# EAGLE board ethernet (EAGLE 6.4)
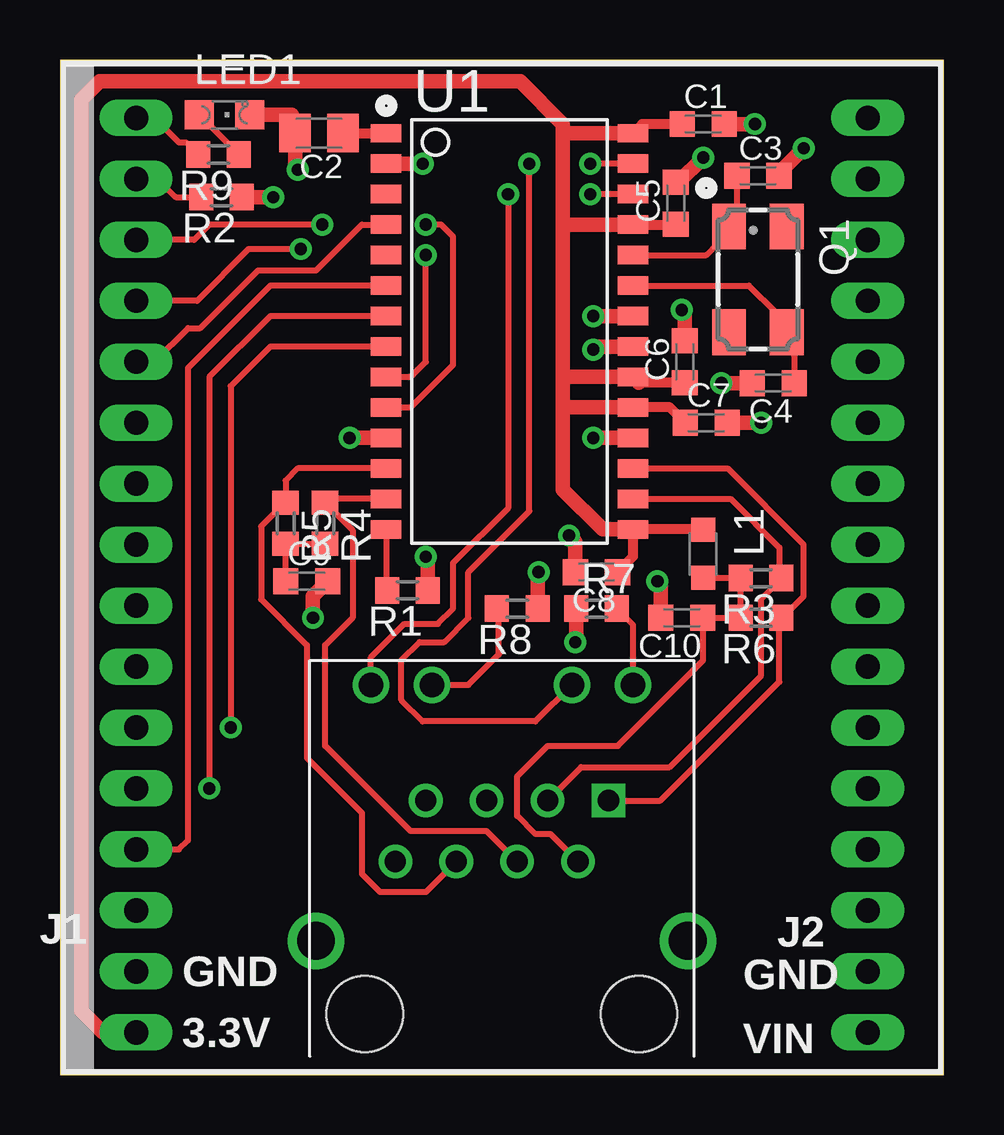
[diagram p0: board, top side]
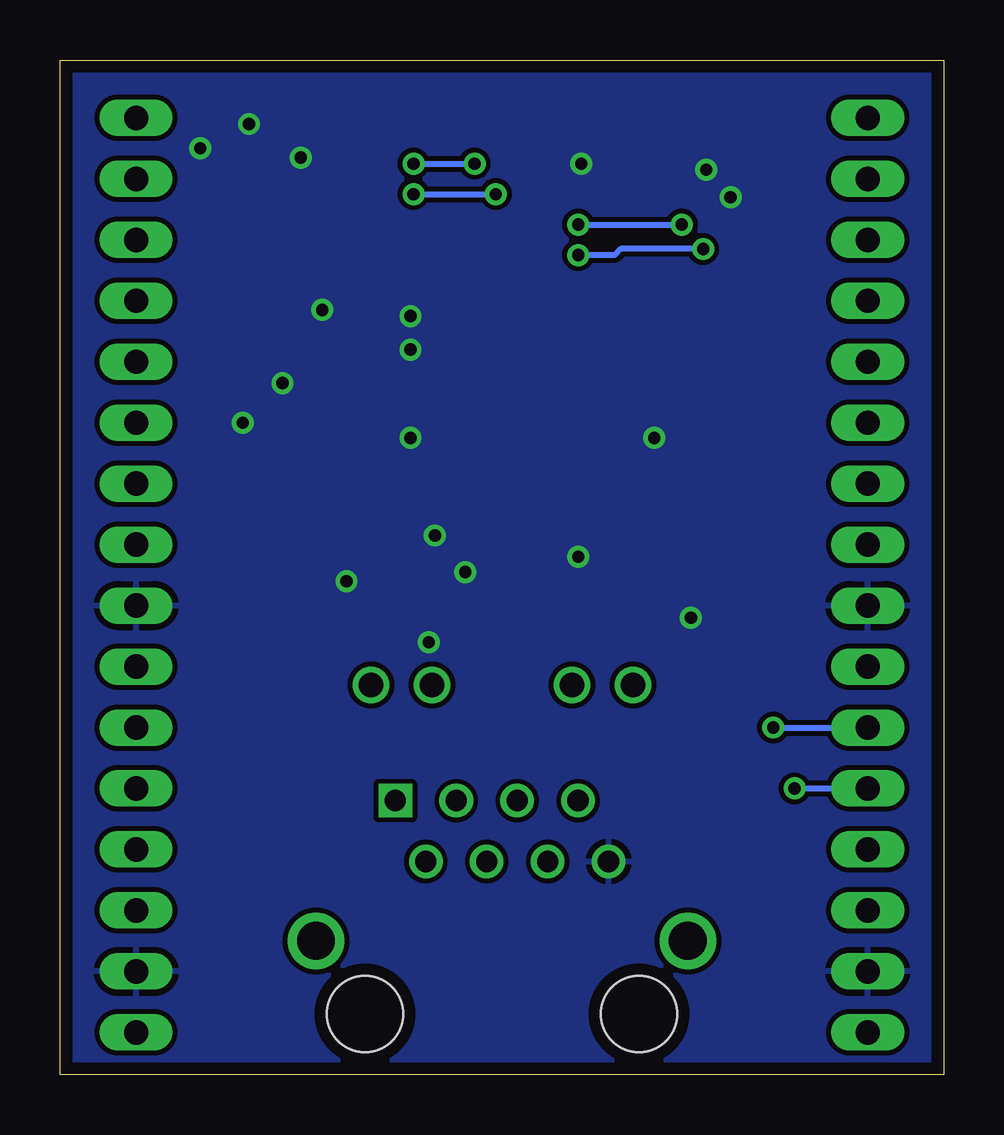
[diagram p1: board, bottom side, seen from below]

Size 36.83 x 42.29 mm. Coordinates in mm from the lower left corner, seen from the top.
Outline: 0,0 36.83,0 36.83,42.29 0,42.29 0,0
Copper layers (1*16): Top 0.035mm / dielectric 1.5mm / Bottom 0.035mm
Design rules "default *": minimum track width 10mil, minimum drill 20mil, track to track 8mil, track to pad 8mil, pad to pad 8mil, via to via 8mil, smd to smd 8mil, copper to edge 20mil, drill to drill 8mil, minimum pad ring 10mil, minimum via ring 8mil, stop-mask expansion 4mil, vias tented up to drill 0mil, thermal gap 10mil

## Footprints (pad centres in the part's own frame; a part is rotated, then mirrored left to right if it is on the bottom)
C0603K = smd 1.05 x 1.08: 1 -0.875,0; 2 0.875,0
C0805K = smd 1.3 x 1.6: 1 -1,0; 2 1,0
MA016-1 = drill 1.016 long: 1 -19.05,0; 2 -16.51,0; 3 -13.97,0; 4 -11.43,0; 5 -8.89,0; 6 -6.35,0; 7 -3.81,0; 8 -1.27,0; 9 1.27,0; 10 3.81,0; 11 6.35,0; 12 8.89,0; 13 11.43,0; 14 13.97,0; 15 16.51,0; 16 19.05,0
SI-50154 = drill 0.889 square: P$1 10.16,8.89 | drill 0.889: P$2 8.89,6.35; P$3 7.62,8.89; P$4 6.35,6.35; P$5 5.08,8.89; P$6 3.81,6.35; P$7 2.54,8.89; P$8 1.27,6.35 | drill 1.016: P$9 11.176,13.716; P$10 8.636,13.716; P$11 2.794,13.716; P$12 0.254,13.716 | drill 1.575: P$13 13.462,3.048; P$14 -2.032,3.048 | hole 3.175: 0,0; 11.43,0
L2012C = smd 1 x 1: 1 -1,0; 2 1,0
CHIPLED_0805 = smd 1.2 x 1.2: A 0,-1.05; C 0,1.05
CTS406 = smd 1.9 x 1.4: 1 -2.2,-1.2; 2 2.2,-1.2; 3 2.2,1.2; 4 -2.2,1.2
R0603 = smd 1 x 1.1: 1 -0.85,0; 2 0.85,0
SO-28W = smd 0.762 x 1.27: 1 -8.255,-5.207; 2 -6.985,-5.207; 3 -5.715,-5.207; 4 -4.445,-5.207; 5 -3.175,-5.207; 6 -1.905,-5.207; 7 -0.635,-5.207; 8 0.635,-5.207; 9 1.905,-5.207; 10 3.175,-5.207; 11 4.445,-5.207; 12 5.715,-5.207; 13 6.985,-5.207; 14 8.255,-5.207; 15 8.255,5.08; 16 6.985,5.08; 17 5.715,5.08; 18 4.445,5.08; 19 3.175,5.08; 20 1.905,5.08; 21 0.635,5.08; 22 -0.635,5.08; 23 -1.905,5.08; 24 -3.175,5.08; 25 -4.445,5.08; 26 -5.715,5.08; 27 -6.985,5.08; 28 -8.255,5.08

## Placement (x,y rotation side)
C1  0.1 uF  [C0603K]  26.8,39.62 0 top
C2  22 uF  [C0805K]  10.79,39.24 180 top
C3  18 pF  [C0603K]  29.08,37.47 0 top
C4  18 pF  [C0603K]  29.72,28.83 180 top
C5  0.1 uF  [C0603K]  25.65,36.32 90 top
C6  0.1 uF  [C0603K]  26.04,29.72 90 top
C7  0.1 uF  [C0603K]  26.92,27.18 0 top
C8  0.1 uF  [C0603K]  22.35,20.95 180 top
C9  0.1 uF  [C0603K]  10.29,20.57 0 top
C10  0.1 uF  [C0603K]  25.91,19.05 180 top
J1  MA016-1  [MA016-1]  3.17,20.83 90 top
J2  MA016-1  [MA016-1]  33.66,20.83 90 top
J3  SI-50154  [SI-50154]  12.7,2.54 0 top
L1  Ferrite 80mA  [L2012C]  26.8,21.72 270 top
LED1  Green  [CHIPLED_0805]  6.86,40.01 270 top
Q1  25 MHz  [CTS406]  29.08,33.15 270 top
R1  2.32k 1%  [R0603]  14.48,20.19 180 top
R2  150  [R0603]  6.73,36.58 180 top
R3  50  [R0603]  29.21,20.7 180 top
R4  50  [R0603]  11.05,22.99 270 top
R5  50  [R0603]  9.4,22.99 270 top
R6  50  [R0603]  29.21,19.05 180 top
R7  150  [R0603]  22.35,19.43 0 top
R8  150  [R0603]  19.05,19.43 180 top
R9  150  [R0603]  6.6,38.35 180 top
U1  ENC28J60  [SO-28W]  18.8,30.99 270 top

## Library data of the parts
C1-C10 L1 R1-R9 = rcl
J1-J3 U1 = sapphire
LED1 = led
Q1 = crystal; OC_FARNELL: unknown; OC_NEWARK: unknown

## Nets
ADC0: J2.9
ADC1: J2.10
ADC2: J2.11
ADC3: J2.12
ADC4_TCK: J2.13
ADC5_TMS: J2.14
ADC6_TDO: J2.15
ADC7_TDI: J2.16
GND: C1.2 C2.2 C3.2 C4.2 C5.2 C6.2 C7.2 C8.2 C9.2 C10.2 J1.2 J1.8 J2.2 J2.8 J3.P$8 LED1.C R1.1 R2.1 R7.1 R8.1 U1.2 U1.11 U1.18 U1.21 U1.22
GPIO0: J1.16 R9.2
GPIO1: J1.15 R2.2
GPIO2: J1.14 U1.10
GPIO3: J1.13 U1.9
GPIO4_INT0: J1.12 U1.4
GPIO5_INT1: J1.11
GPIO6_INT2: J1.10
GPIO7_INT3: J1.9
LEDA: J3.P$10 U1.27
LEDA-: J3.P$9 R7.2
LEDB: J3.P$12 U1.26
LEDB-: J3.P$11 R8.2
MISO: J1.4 U1.6
MOSI: J1.5 U1.7
N$107: LED1.A R9.1
N$124: J3.P$5
N$130: J3.P$13
N$131: J3.P$14
PWM0: J2.5
PWM1: J2.6
PWM2: J2.7
RBIAS: R1.2 U1.14
RESET: J1.3
RSVD0: J2.4
RSVD1: J2.3
SCK: J1.6 U1.8
SS: J1.7
TCT: C10.1 J3.P$2 L1.2 R3.2 R6.2
TPIN+: J3.P$4 R4.1 U1.13
TPIN-: J3.P$6 R5.1 U1.12
TPIN_CAP: C9.1 R4.2 R5.2
TPOUT+: J3.P$1 R6.1 U1.17
TPOUT-: J3.P$3 R3.1 U1.16
V_IN: J2.1
VCAP: C2.1 U1.1
VCC: C1.1 C5.1 C6.1 C7.1 C8.1 J1.1 L1.1 U1.15 U1.19 U1.20 U1.25 U1.28
XTAL3: C3.1 Q1.1 U1.24
XTAL4: C4.1 Q1.3 U1.23

## Tracks (layer width: path | path; a pad name or v marks a point on that pad's centre or on a via)
GND  (via drill 0.51)
  Top 0.61: LED1.C 9.65,40.01 9.65,39.39 C2.2 9.79,37.83 v9.91,37.72 | R2.1 v8.89,36.58 | U1.2 v15.11,37.97 | C5.2 25.77,37.2 v26.8,38.23 | C1.2 v28.96,39.62 | C3.2 29.96,37.58 v30.99,38.61 | C6.2 26.04,31.75 v25.91,31.88 | v22.23,31.62 U1.22 | U1.21 22.35,30.35 v22.23,30.23 | U1.18 v22.23,26.54 | v27.56,28.83 C4.2 | C7.2 v29.21,27.18 | C8.2 21.48,22.21 v21.21,22.48 | R8.1 19.9,20.92 v19.94,20.95 | R7.1 21.5,18.07 v21.46,18.03 | C10.2 25.03,20.43 v24.89,20.57 | R1.1 15.33,21.5 v15.24,21.59 | v10.54,19.05 10.54,19.95 C9.2 | v12.06,26.54 U1.11
  pour Bottom: -0.89,43.43 -0.89,-1.52 38.86,-1.52 38.86,43.43
GPIO0
  Top 0.254: J1.16 3.94,39.88 4.95,38.86 5.25,38.86 R9.2
GPIO1
  Top 0.254: J1.15 4.06,37.34 4.83,36.58 R2.2
GPIO2  (via drill 0.51)
  Top 0.254: U1.10 14.61,27.81 16.38,29.59 16.38,34.92 15.88,35.43 v15.24,35.43 | v10.92,35.43 6.22,35.43 5.59,34.8 J1.14
  Bottom 0.254: v15.24,35.43 v10.92,35.43
GPIO3  (via drill 0.51)
  Top 0.254: U1.9 14.61,29.08 15.24,29.72 v15.24,34.16 | J1.13 5.71,32.26 7.87,34.42 v10.03,34.42
  Bottom 0.254: v10.03,34.42 13.46,34.42 13.72,34.16 v15.24,34.16
GPIO4_INT0
  Top 0.254: J1.12 3.94,29.72 5.33,31.11 5.84,31.11 8.26,33.53 10.67,33.53 12.57,35.43 U1.4
LEDA  (via drill 0.51)
  Top 0.254: J3.P$10 19.81,14.73 15.11,14.73 14.22,15.62 14.22,17.27 14.99,18.03 16,18.03 17.02,19.05 17.02,20.95 19.56,23.5 v19.56,37.97 | U1.27 v22.1,37.97
  Bottom 0.254: v22.1,37.97 v19.56,37.97
LEDA-
  Top 0.254: J3.P$9 23.88,18.76 R7.2
LEDB  (via drill 0.51)
  Top 0.254: J3.P$12 12.95,17.4 14.35,18.8 15.75,18.8 16.38,19.43 16.38,21.34 18.67,23.62 v18.67,36.7 | U1.26 v22.1,36.7
  Bottom 0.254: v22.1,36.7 v18.67,36.7
LEDB-
  Top 0.254: J3.P$11 17.02,16.26 18.29,17.53 18.29,19.34 R8.2
MISO
  Top 0.254: U1.6 8.76,32.89 5.33,29.46 5.33,9.78 4.95,9.4 J1.4
MOSI  (via drill 0.51)
  Top 0.254: U1.7 8.76,31.62 6.22,29.08 v6.22,11.94
  Bottom 0.254: v6.22,11.94 J1.5
N$107
  Top 0.254: LED1.A R9.1
RBIAS
  Top 0.254: U1.14 13.59,20.23 R1.2
SCK  (via drill 0.51)
  Top 0.254: U1.8 8.76,30.35 7.11,28.7 v7.11,14.48
  Bottom 0.254: v7.11,14.48 J1.6
TCT
  Top 0.254: J3.P$2 20.45,10.03 19.81,10.03 19.05,10.79 19.05,12.45 20.32,13.72 23.24,13.72 26.8,17.27 26.8,19.04 C10.1 R6.2 R3.2 26.81,20.7 L1.2
TPIN+
  Top 0.254: U1.13 11.21,24 R4.1 12.19,22.69 12.19,19.05 11.05,17.91 11.05,13.72 14.61,10.16 17.78,10.16 J3.P$4
TPIN-
  Top 0.254: U1.12 9.91,25.27 9.4,24.77 R5.1 9.36,23.84 8.38,22.86 8.38,19.81 10.29,17.91 10.29,13.21 12.57,10.92 12.57,8.38 13.34,7.62 15.24,7.62 J3.P$6
TPIN_CAP
  Top 0.254: R4.2 R5.2 9.41,22.12 C9.1
TPOUT+
  Top 0.254: U1.17 27.81,25.27 30.99,22.1 30.99,19.94 30.1,19.05 R6.1 29.97,19.09 29.97,16.38 25.02,11.43 J3.P$1
TPOUT-
  Top 0.254: J3.P$3 21.72,12.83 25.4,12.83 29.21,16.64 29.21,19.85 R3.1 29.97,20.79 29.97,21.97 27.94,24 U1.16
VCAP
  Top 0.406: C2.1 U1.1
VCC
  Top 0.406: C1.1 24.26,39.62 U1.28 | U1.25 25.89,35.43 C5.1 | C6.1 24.12,28.84 | C7.1 25.41,27.81 U1.19 | L1.1 26.78,22.73 24,22.73 U1.15 23.88,21.6 C8.1
  Top 0.61: J1.1 1.78,1.78 0.89,2.67 0.89,40.64 1.65,41.4 19.18,41.4 20.95,39.62 20.95,39.37 | 20.95,27.81 20.95,24.38 22.61,22.73 24,22.73 | 20.95,27.81 20.95,29.08 | 20.95,29.08 20.95,35.43 | 20.95,35.43 20.95,39.37 | U1.28 21.08,39.24 arc-90 20.95,39.37 | 24.12,28.84 U1.20 20.95,29.08 | U1.19 20.95,27.81 | U1.25 20.95,35.43
XTAL3
  Top 0.254: U1.24 26.92,34.16 27.43,34.67 | 27.43,34.67 27.43,34.9 Q1.1 | C3.1 28.21,35.45 27.43,34.67
XTAL4
  Top 0.254: U1.23 28.7,32.89 29.84,31.75 29.84,31.39 Q1.3 29.96,30.62 arc-90 30.59,29.99 C4.1

## Text on the board
tSilk: GND | GND | 3.3V | VIN